# Altium PCB PCB1.PcbDoc
Units mm, origin at the board's own origin, x right, y up, seen from the top; angles counter-clockwise.
Board outline 80 x 75 mm, 2 copper layers (Top Layer, Bottom Layer); 50 components, 62 nets, 269 pads, 71 vias.
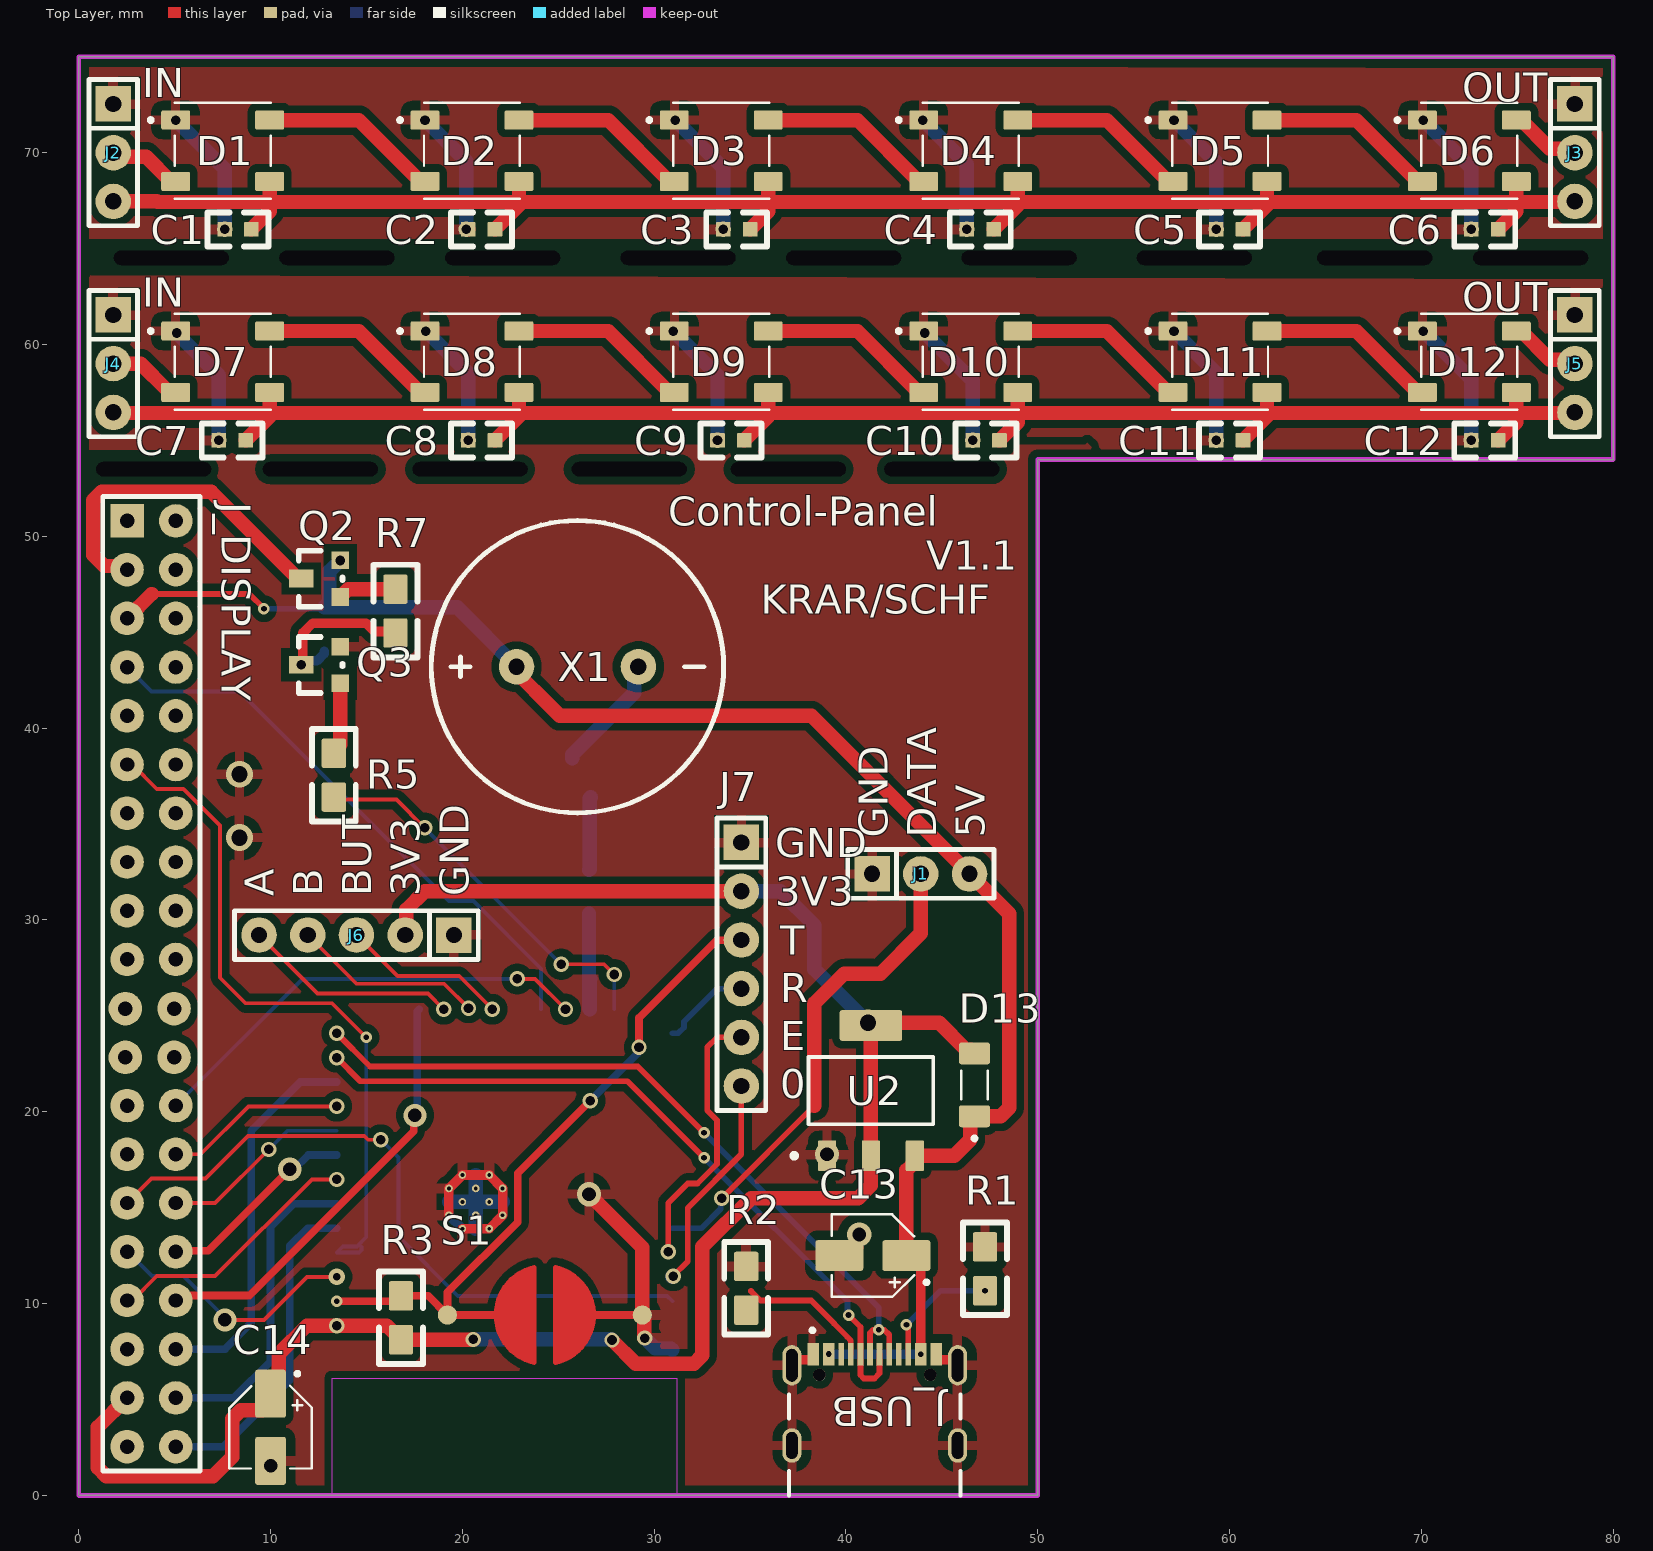
[diagram p0: Top Layer view]
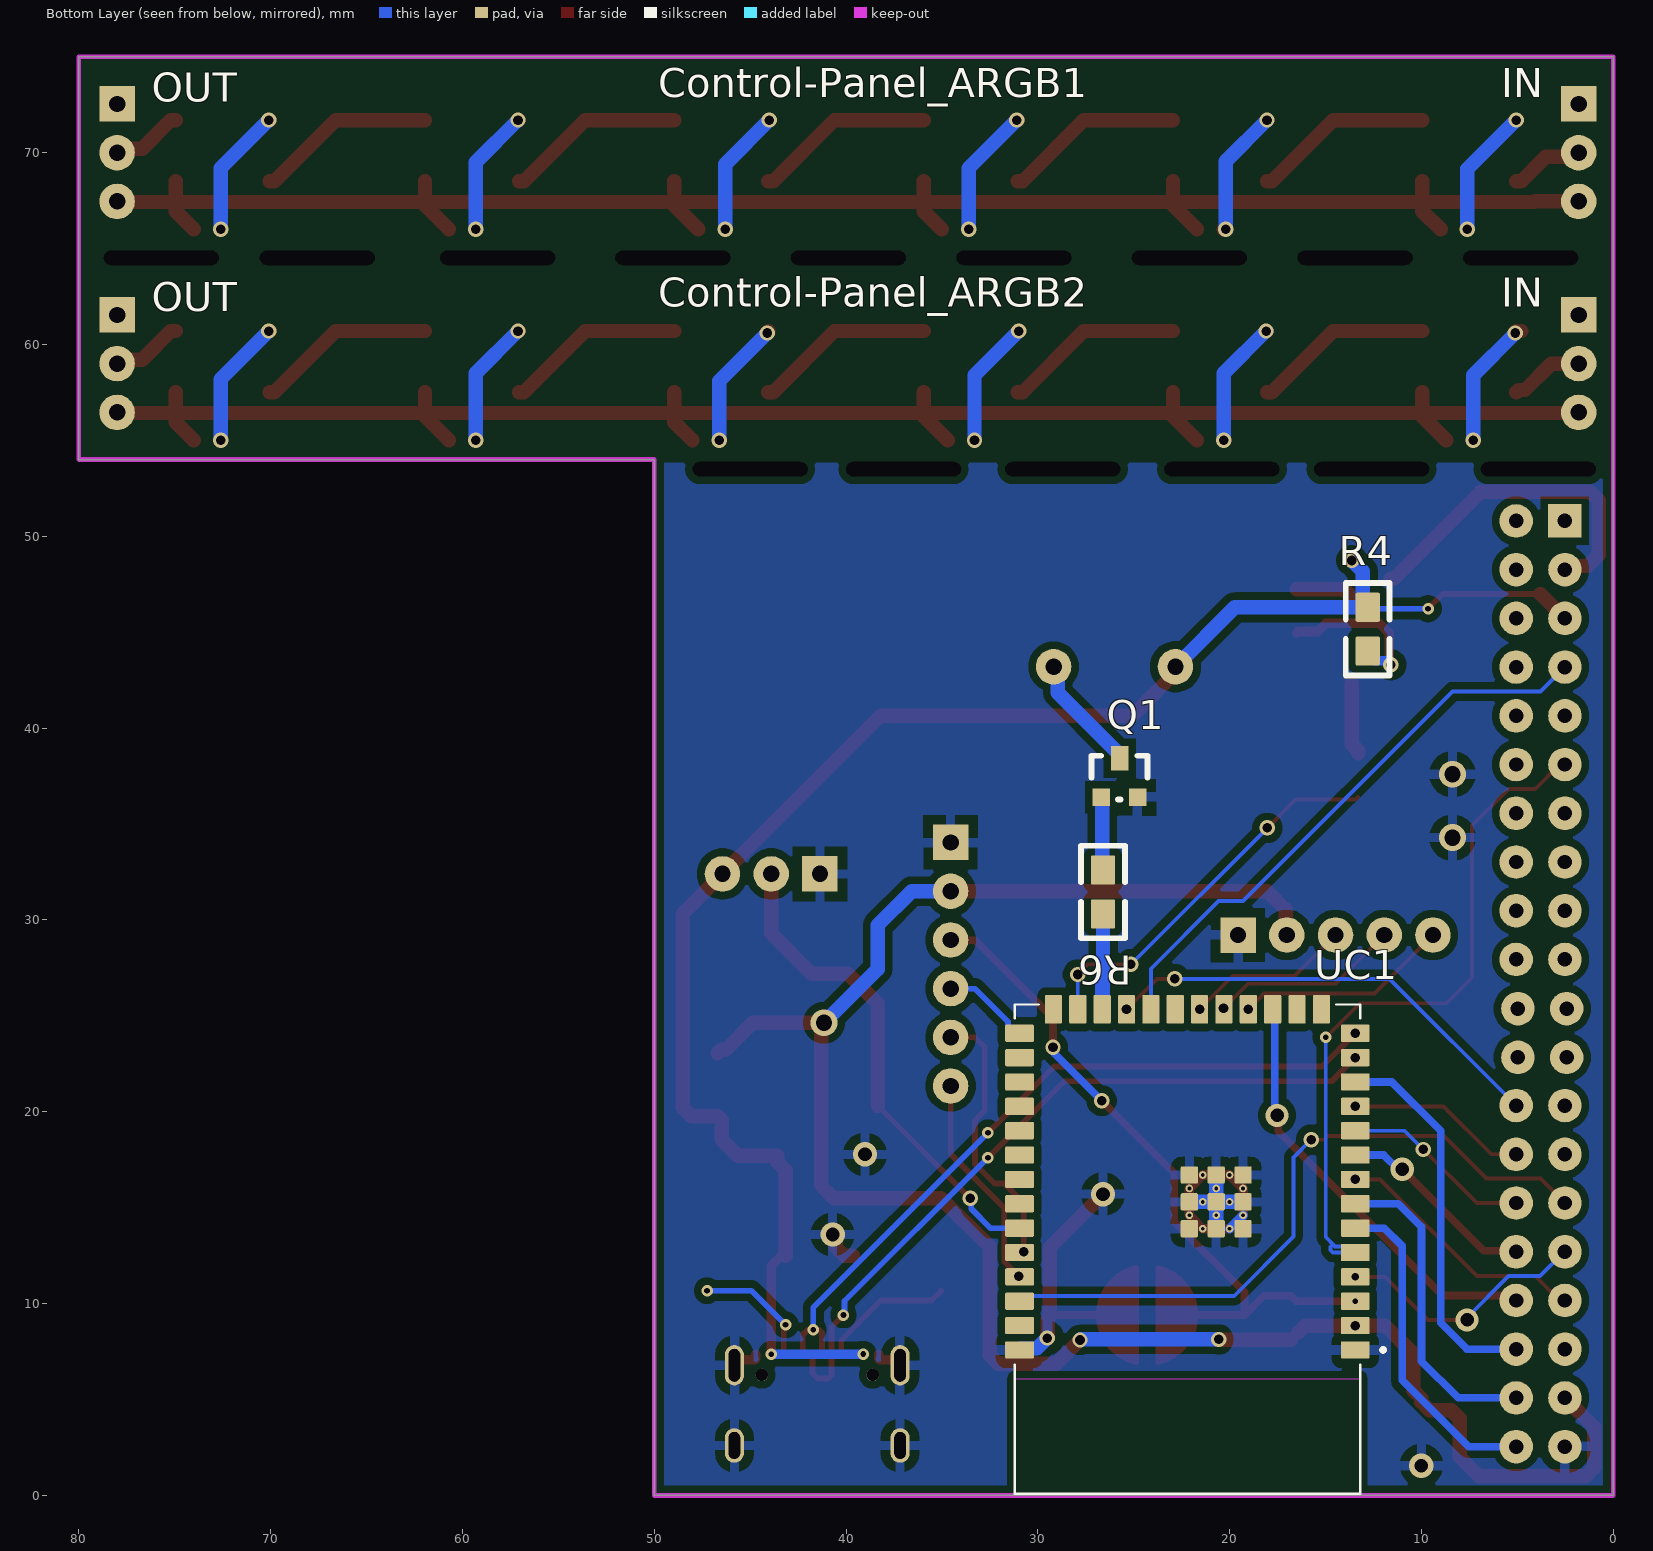
[diagram p1: Bottom Layer view, seen from below]

## Layer stack, top to bottom
Top Solder: solder mask 0.0102, Solder Resist, Dk 3.5
Top Layer: signal copper 0.0356
Dielectric 1: dielectric 0.32, FR-4, Dk 4.8
Bottom Layer: signal copper 0.0356
Bottom Solder: solder mask 0.0102, Solder Resist, Dk 3.5

## Board outline
0,0 50,0 50,54 80,54 80,75 0,75

## Design rules (kind name [scope] priority, off if disabled: settings)
Clearance [All] p1: gap=0.4 ignorepadtopadclearanceinfootprint=FALSE except(0.2: Arc-Arc Arc-Track Arc-SMDPad Arc-THPad Arc-Via Arc-Text Arc-Hole Track-Track Track-SMDPad Track-THPad Track-Via Track-Text Track-Hole SMDPad-SMDPad SMDPad-THPad SMDPad-Via SMDPad-Text SMDPad-Hole THPad-THPad THPad-Via THPad-Text THPad-Hole Via-Via Via-Text Via-Hole Text-Text Text-Hole)
HoleSize [All] p1: absolutevalues=TRUE maxlimit=6 minlimit=0.4 maxpercent=80.000 minpercent=20.000
MinimumAnnularRing [All] p1: minimumring=0.5
MinimumSolderMaskSliver [All] p1: minsoldermaskwidth=0
PolygonConnect [All] p1: connectstyle=Relief reliefconductorwidth=0.5 reliefentries=4 polygonreliefangle="90 Angle" airgapwidth=0.5
RoutingVias [All] p1: holewidth=0.75 width=1.5 viastyle="Through Hole" minholewidth=0.2 minwidth=0.6 maxholewidth=1.2 maxwidth=2
SilkToSilkClearance [All] p1: silktosilkclearance=0
SilkToSolderMaskClearance [IsPad] p1: minsilkscreentomaskgap=0 clearancetoexposedcopper=TRUE
SolderMaskExpansion [All] p1: expansion=0.102 istentingtop=FALSE
Width [All] p1: maxlimit=6 minlimit=0.2 preferedwidth=0.75
26 further rules are at their usual default settings.

## Components (designator, comment, footprint, x,y, rotation, side; value= is the part's Value field where it differs from the comment)
C1 "100nF" C_SMD_0603 8.302,66 r0 top
C2 "100nF" C_SMD_0603 21,66 r0 top
C3 "100nF" C_SMD_0603 34.302,66 r0 top
C4 "100nF" C_SMD_0603 47,66 r0 top
C5 "100nF" C_SMD_0603 60,66 r0 top
C6 "100nF" C_SMD_0603 73.302,66 r0 top
C7 "100nF" C_SMD_0603 8,55 r0 top
C8 "100nF" C_SMD_0603 21,55 r0 top
C9 "100nF" C_SMD_0603 34,55 r0 top
C10 "100nF" C_SMD_0603 47.302,55 r0 top
C11 "100nF" C_SMD_0603 60,55 r0 top
C12 "100nF" C_SMD_0603 73.302,55 r0 top
C13 "10µF" C_SMD_B-Typ 41.4,12.5 r180 top
C14 "10µF" C_SMD_B-Typ 10,3.55 r270 top
D1 "WS2812b" D_SMD_LED-ARGB 8,70 r180 top
D2 "WS2812b" D_SMD_LED-ARGB 21,70 r180 top
D3 "WS2812b" D_SMD_LED-ARGB 34,70 r180 top
D4 "WS2812b" D_SMD_LED-ARGB 47,70 r180 top
D5 "WS2812b" D_SMD_LED-ARGB 60,70 r180 top
D6 "WS2812b" D_SMD_LED-ARGB 73,70 r180 top
D7 "WS2812b" D_SMD_LED-ARGB 8,59 r180 top
D8 "WS2812b" D_SMD_LED-ARGB 21,59 r180 top
D9 "WS2812b" D_SMD_LED-ARGB 34,59 r180 top
D10 "WS2812b" D_SMD_LED-ARGB 47,59 r180 top
D11 "WS2812b" D_SMD_LED-ARGB 60,59 r180 top
D12 "WS2812b" D_SMD_LED-ARGB 73,59 r180 top
D13 "FDLL4148" SOD-80-2 46.7,21.4 r90 top
J1 "OUTPUT_PCB" Sip-3 43.9,32.4 r0 top
J2 "INPUT_L1" Sip-3 1.8,70 r270 top
J3 "OUTPUT_L1" Sip-3 78,70 r270 top
J4 "INPUT_L2" Sip-3 1.8,59 r270 top
J5 "OUTPUT_L2" Sip-3 78,59 r270 top
J6 "ENCODER_KY-040" SIP-5 14.478,29.21 r180 top
J7 "SERIAL" SIP-6 34.544,26.416 r270 top
J_DISPLAY "DISPLAY" J_2x20 3.744,26.67 r270 top
J_USB "J_USB-C" GCT_USB4105-GF-A 41.5,2.6 r0 top
Q1 "BC846" SOT-23-3_BC846 26.7,36.4 r180 bottom
Q2 "BC856" SOT-23-3_BC856 13.632,46.835 r90 top
Q3 "BC846" SOT-23-3_BC846 13.632,42.335 r90 top
R1 "5k1" R_SMD_0805 47.244,11.811 r270 top
R2 "5k1" R_SMD_0805 34.798,10.795 r270 top
R3 "10k" R_SMD_0805 16.8,9.257 r270 top
R4 "10k" R_SMD_0805 12.8,45.157 r90 bottom
R5 "1k" R_SMD_0805 13.3,37.543 r270 top
R6 "1k" R_SMD_0805 26.6,31.457 r270 bottom
R7 "1k" R_SMD_0805 16.51,46.101 r270 top
S1 "Lötpad" S_SMD_Pad-NO 24.3,9.4 r180 top
U2 "AMS1117" U_SMD_AMS1117 41.3,21.1 r90 top
UC1 "UC_ESP32-S3-WROOM" XCVR_ESP32S3WROOM1N8R8 22.2,12.84 r0 bottom
X1 "Piezo" X_THT_PIEZZO 26,43.2 r0 top

## Footprints (in the part's own frame and the unit in brackets; to place one, negate y for a bottom-side part, rotate by r counter-clockwise, add the part's x,y. Pads: shape width x height; smd on the part's side, far side on the other; paste and mask are expansions set on the pad)
C_SMD_0603 [mil] "LB-2024-04-17"
  rrect10% 30x30 smd paste-0.79 mask+1.97: 1(-27.5,0) 2(27.5,0)
  silkscreen extent -62,-35 62,35
C_SMD_B-Typ [mm] "LB-2024-04-16"
  rrect15% 2.5x1.6 smd paste-0.02 mask+0.05: 1(-1.75,0) 2(1.75,0)
  silkscreen extent -2.89,-2.15 2.15,2.15
D_SMD_LED-ARGB [mm] "LB-2024-04-17"
  rrect15% 1.5x1 smd paste-0.02 mask+0.05: 1(-1.95,1.5) 2(-1.95,-1.7) 3(2.95,-1.7) 4(2.95,1.5)
  silkscreen extent -2,-2.6 4.35,2.4
GCT_USB4105-GF-A [mm] "USB-C: Power + USB 2.0"
  rect 0.6x1.15 smd mask+0.05: A1_B12(-3.2,4.755) A4_B9(-2.4,4.755) B1_A12(3.2,4.755) B4_A9(2.4,4.755)
  rect 0.3x1.15 smd mask+0.05: A5(-1.25,4.755) A6(-0.25,4.755) A7(0.25,4.755) A8(1.25,4.755) B5(1.75,4.755) B6(0.75,4.755) B7(-0.75,4.755) B8(-1.75,4.755)
  oval 1x2.1 hole 0.6 slot 1.7 at 90 deg: SH1(-4.32,4.18) SH2(4.32,4.18)
  oval 1x1.8 hole 0.6 slot 1.4 at 90 deg: SH3(-4.32,0) SH4(4.32,0)
  round 0.65 hole 0.65 unplated: ""(-2.89,3.68) ""(2.89,3.68)
  silkscreen extent -4.47,-2.6 4.47,6.1
J_2x20 [mm] "LB-2024-4-19"
  rect 1.75x1.75 hole 0.75: 1(-24.13,-1.224)
  round 1.75 hole 0.75: 2(-24.13,1.316) 3(-21.59,-1.224) 4(-21.59,1.316) 5(-19.05,-1.224) 6(-19.05,1.316) 7(-16.51,-1.224) 8(-16.51,1.316) 9(-13.97,-1.224) 10(-13.97,1.316) 11(-11.43,-1.224) 12(-11.43,1.316) 13(-8.89,-1.224) 14(-8.89,1.316) 15(-6.35,-1.224) 16(-6.35,1.316) 17(-3.81,-1.224) 18(-3.81,1.316) 19(-1.27,-1.224) 20(-1.27,1.316) 21(1.296,-1.316) 22(1.296,1.224) 23(3.836,-1.316) 24(3.836,1.224) 25(6.35,-1.224) 26(6.35,1.316) 27(8.89,-1.224) 28(8.89,1.316) 29(11.43,-1.224) 30(11.43,1.316) 31(13.97,-1.224) 32(13.97,1.316) 33(16.51,-1.224) 34(16.51,1.316) 35(19.05,-1.224) 36(19.05,1.316) 37(21.59,-1.224) 38(21.59,1.316) 39(24.13,-1.224) 40(24.13,1.316)
  silkscreen extent -25.4,-2.49 25.4,2.59
R_SMD_0805 [mil] "LB-2024-04-17"
  rrect15% 60x50 smd paste-0.79 mask+1.97: 1(-45,0) 2(45,0)
  silkscreen extent -95,-45 95,45
S_SMD_Pad-NO [mm] "LB-2024-04-18"
  round 1 smd: 1(-5.08,0) 2(5.08,0)
  Top Layer region: -0.551,-2.48 -0.551,2.48 -0.618,2.413 -1.016,2.413 -1.524,1.905 -1.651,1.905 -2.159,1.397 -2.159,1.143 -2.54,0.762 -2.54,-0.762 -2.159,-1.143 -2.159,-1.397 -1.27,-2.286 -1.016,-2.286 -0.762,-2.54 -0.702,-2.48
  Top Layer region: 0.551,2.48 0.551,-2.48 0.618,-2.413 1.016,-2.413 1.524,-1.905 1.651,-1.905 2.159,-1.397 2.159,-1.143 2.54,-0.762 2.54,0.762 2.159,1.143 2.159,1.397 1.27,2.286 1.016,2.286 0.762,2.54 0.702,2.48
  Top Layer lines w0.254: 2.54,0 ccw(c0,0) 0.551,2.48 0.551,-2.48 ccw(c0,0) 2.54,0 ; -0.551,2.48 ccw(c0,0) -0.551,-2.48 -0.551,2.48
  Top Layer lines w0.4: 5.08,0 2.54,0 2.032,0 ; -2.032,0 -5.08,0
Sip-3 [mm] "LB-2024-04-17"
  rect 1.85x1.85 hole 0.85: 1(-2.54,0)
  round 1.85 hole 0.85: 2(0,0) 3(2.54,0)
  silkscreen extent -3.81,-1.27 3.81,1.27
SIP-5 [mm] "LB-2024-04-17"
  rect 1.85x1.85 hole 0.85: 1(-5.08,0)
  round 1.85 hole 0.85: 2(-2.54,0) 3(0,0) 4(2.54,0) 5(5.08,0)
  silkscreen extent -6.35,-1.27 6.35,1.27
SIP-6 [mm] "LB-2024-04-17"
  rect 1.85x1.85 hole 0.85: 1(-7.62,0)
  round 1.85 hole 0.85: 2(-5.08,0) 3(-2.54,0) 4(0,0) 5(2.54,0) 6(5.08,0)
  silkscreen extent -8.89,-1.27 6.35,1.27
SOD-80-2 [mm] "SMD-Dioden Footprint z.b.: FDLL4148"
  rrect25% 1.14x1.63 smd: 1(1.64,0) 2(-1.64,0)
  silkscreen extent -2.89,-0.7 0.75,0.7
SOT-23-3_BC846 [mil] "SMD Footprint für BC846"
  rect 36x36 smd: B(0,0) E(75,0)
  rect 36x50 smd: C(38,80)
  silkscreen extent -20,-5 95,85
SOT-23-3_BC856 [mil] "SMD Footprint für BC856 (PNP)"
  rect 36x36 smd: B(0,0) E(75,0)
  rect 36x50 smd: C(38,80)
  silkscreen extent -20,-5 95,85
U_SMD_AMS1117 [mm] "LB-2024-04-17"
  rrect15% 1.604x0.952 smd paste-0.02 mask+0.05: 1(-3.395,2.29) 2(-3.395,0) 3(-3.395,-2.29)
  rrect15% 1.604x3.262 smd paste-0.02 mask+0.05: 2(3.395,0)
  silkscreen extent -3.52,-3.25 1.75,4.12
X_THT_PIEZZO [mm] "LB-2024-04-18"
  round 1.85 hole 0.85: 1(-3.175,0) 2(3.175,0)
  silkscreen extent -7.62,-7.62 7.62,7.62
XCVR_ESP32S3WROOM1N8R8 [mm]
  rrect15% 1.5x0.9 smd paste-0.02 mask+0.05: 1(-8.75,5.26) 1(8.75,5.26) 2(-8.75,3.99) 3(-8.75,2.72) 4(-8.75,1.45) 5(-8.75,0.18) 6(-8.75,-1.09) 7(-8.75,-2.36) 8(-8.75,-3.63) 9(-8.75,-4.9) 10(-8.75,-6.17) 11(-8.75,-7.44) 12(-8.75,-8.71) 13(-8.75,-9.98) 14(-8.75,-11.25) 27(8.75,-11.25) 28(8.75,-9.98) 29(8.75,-8.71) 30(8.75,-7.44) 31(8.75,-6.17) 32(8.75,-4.9) 33(8.75,-3.63) 34(8.75,-2.36) 35(8.75,-1.09) 36(8.75,0.18) 37(8.75,1.45) 38(8.75,2.72) 39(8.75,3.99)
  rrect15% 0.9x0.9 smd paste-0.02 mask+0.05: 1(-2.9,-3.86) 1(-2.9,-2.46) 1(-2.9,-1.06) 1(-1.5,-3.86) 1(-1.5,-2.46) 1(-1.5,-1.06) 1(-0.1,-3.86) 1(-0.1,-2.46) 1(-0.1,-1.06)
  round 0.4 hole 0.2 mask+0: 1(-2.9,-3.16) 1(-2.9,-1.76) 1(-2.2,-3.86) 1(-2.2,-2.46) 1(-2.2,-1.06) 1(-1.5,-3.16) 1(-1.5,-1.76) 1(-0.8,-3.86) 1(-0.8,-2.46) 1(-0.8,-1.06) 1(-0.1,-3.16) 1(-0.1,-1.76)
  rrect15% 0.9x1.5 smd paste-0.02 mask+0.05: 15(-6.985,-12.5) 16(-5.715,-12.5) 17(-4.445,-12.5) 18(-3.175,-12.5) 19(-1.905,-12.5) 20(-0.635,-12.5) 21(0.635,-12.5) 22(1.905,-12.5) 23(3.175,-12.5) 24(4.445,-12.5) 25(5.715,-12.5) 26(6.985,-12.5)
  Keep-Out Layer region: 9,6.75 -9,6.75 -9,12.75 9,12.75
  Keep-Out Layer region: 9,6.75 -9,6.75 -9,12.75 9,12.75
  silkscreen extent -10.3,-12.75 9,12.75

## Part data
C1 C2 C3 C4 C5 C6 C7 C8 C9 C10 C11 C12: library part C_SMD_KO, "Kondensator SMD Universal, Keramik, Folie, usw."
C13 C14: library part C_SMD_ELK, "SMD Elektrolytkondensator"
D1 D2 D3 D4 D5 D6 D7 D8 D9 D10 D11 D12: library part D_SMD_LED-ARGB, "Diode SMD ARGB"
D13: library part D_SMD_Silizium, "Diode SMD Silizium", Spannung For.=0,7V
J1 J2 J3 J4 J5: library part J_THT_CON3, "Stecker"
J6: library part J_THT_CON5, "Stecker"
J7: library part J_THT_CON6, "Stecker"
J_DISPLAY: library part "J_THT_IDC 2x20", "IDC-Con 2x20"
J_USB: "USB4105-GF-", Package=None, Availability=Unavailable, MF="{'manufacturer': u'GCT'}", MP=USB4105-GF-A, Price=None
Q1 Q3: library part Q_SMD_NPN, "NPN Transistor"
Q2: library part Q_SMD_PNP, "PNP Transistor"
R1 R2 R3 R4 R5 R6 R7: library part R_SMD_Widerstand, "Widerstand SMD"
S1: library part S_SMD_Jumper, "Lötverbinder"
U2: library part U_SMD_AMS1117, "Linearwandler", Dropout Voltage=1.1V, Manufacturer="Advanced Monolithic Systems", Manufacturer Part Number=AMS1117-3.3, Max Junction Temp=+125°C, Max Power Dissipation=1.2W, Max Supply Voltage=15V, Nominal Supply Current=5mA, Output Current=1A, Output Voltage=3.3V, Temperature="-40°C to +125°C", Temperature Range Low=-40°C, Automotive=No, Category=IC, ComponentLink2Description=Datasheet, ComponentLink2URL=http://www.advanced-monolithic.com/pdf/ds1117.pdf, Device Class L1="Integrated Circuits (ICs)", Device Class L2="Power Management ICs", Device Class L3="Voltage Regulators - Linear", Height=1.8mm, Ipc Land Pattern Name=SOT229P700X180-4, Lead Free=Yes, Number Of Outputs=1, Octopart=https://octopart.com/ams1117-3.3-advanced+monolithic+systems-25899300, Output Type=Fixed, Package=AMS1117, RoHS=TRUE, Standoff Height=0.64mm, Temperature Range High=+125°C
UC1: "Bluetooth, WiFi 802.11b/g/n, Bluetooth v5.0 Transceiver Module 2.4GHz PCB Trace Surface Mount", Package=None, Availability="In Stock", Check_prices=https://www.snapeda.com/parts/ESP32-S3-WROOM-1-N8R8/Espressif+Systems/view-part/?ref=eda, MF="Espressif Systems", MP=ESP32-S3-WROOM-1-N8R8, Price=None, Purchase-URL=https://pricing.snapeda.com/search?q=ESP32-S3-WROOM-1-N8R8&ref=eda, SnapEDA_Link=https://www.snapeda.com/parts/ESP32-S3-WROOM-1-N8R8/Espressif+Systems/view-part/?ref=snap
X1: library part X_THT_Piezo, "Piezobuzzer"

## Free pads (board coordinates)
  round 0 hole 0.75 slot 6 at 0 deg unplated: (3.9,53.5) (4.826,64.516) (12.6,53.5) (13.462,64.516) (20.4,53.5) (22.098,64.516) (28.7,53.5) (31.242,64.516) (37,53.5) (39.878,64.516) (45,53.5) (49.022,64.516) (58.166,64.516) (67.564,64.516) (75.692,64.516)

## Via types
v1: diameter 0.8, hole 0.5, Top Layer to Bottom Layer, 49 vias
v2: diameter 0.6, hole 0.3, Top Layer to Bottom Layer, 11 vias
v3: diameter 1.27, hole 0.711, Top Layer to Bottom Layer, 4 vias
v4: diameter 1.4, hole 0.85, Top Layer to Bottom Layer, 3 vias
v5: diameter 1.2, hole 0.7, Top Layer to Bottom Layer, 3 vias
v6: diameter 0.85, hole 0.4, Top Layer to Bottom Layer, 1 vias

## Nets (pads, with @x,y where several pads share a name; then routed paths per layer and width w, separated by ;. In a path a pad name is that pad's centre, name@x,y a point inside that pad or via, vN(x,y) a via of type N, cw(c..) or ccw(c..) an arc to the next point about the centre after c; other vN are vias at no path point)
3V3: C14.1 D13.1 J6.2 J7.2 J_DISPLAY.37 R3.2 U2.2 UC1.2 | length 102.5
  Top Layer w0.75: J_DISPLAY.37 1,3.56 1,1.439 1.439,1 7,1 8,2 8,4 8.439,4.439 9.575,4.439 10,4.864 10,5.05 10.425,5.475 10.425,7.377 11.898,8.85 v1(13.45,8.85) 16.064,8.85 R3.2@16.413,8.501 ; R3.2 16.807,8.121 20.567,8.121 v1(20.574,8.128) ; J6.2 17.083,29.275 17.083,30.545 18.034,31.496 J7.2 ; v1(27.8,8.1) 29.035,6.865 32.073,6.865 32.512,7.304 32.512,12.954 35.052,15.494 40.64,15.494 41.3,16.154 41.3,17.705 U2.2@41.3,24.495 ; v4(41.148,24.638) 41.291,24.495 U2.2@41.3,24.495 ; D13.1 46.505,23.235 46.26,23.235 44.857,24.638 41.443,24.638 U2.2@41.3,24.495
  Bottom Layer w0.75: v1(20.574,8.128) 27.758,8.128 27.786,8.1 v1(27.8,8.1) ; J7.2 36.576,31.496 38.354,29.718 38.354,27.432 v4(41.148,24.638)
5V-BUS: C13.1 D13.2 J1.3 J_DISPLAY.5 J_USB.A4_B9 J_USB.B4_A9 Q2.E R4.2 U2.3 X1.1 | length 88.9
  Top Layer w0.3: 3.81,46.99 8.89,46.99 v2(9.652,46.228)
  Top Layer w0.5: J_USB.A4_B9 v2(39.1,7.366) ; C13.1 43.35,12.5 43.9,11.95 v2(43.9,7.355)
  Top Layer w0.75: J_DISPLAY.5 3.79,46.99 3.81,46.99 ; X1.1 22.825,42.902 24.638,41.089 24.638,41.079 25.077,40.64 38.2,40.64 J1.3 48.514,30.326 48.514,20.199 48.075,19.76 D13.2 46.677,19.76 46.482,19.565 46.482,18.542 45.645,17.705 U2.3 43.59,17.379 43.15,16.939 C13.1
  Bottom Layer w0.3: v2(9.652,46.228) 12.728,46.228 R4.2
  Bottom Layer w0.5: v2(39.1,7.366) 43.889,7.366 v2(43.9,7.355)
  Bottom Layer w0.75: v1(13.632,48.74) 13.06,48.168 13.06,46.56 R4.2 19.725,46.3 X1.1
ARGB: J1.2 UC1.35 | length 25.8
  Top Layer w0.3: v1(33.528,15.494) 38.354,20.32
  Top Layer w0.75: 38.354,20.32 38.354,25.654 39.9,27.2 41.8,27.2 43.9,29.3 J1.2
  Bottom Layer w0.3: UC1.35 32.461,13.93 33.475,14.945 33.475,15.441 v1(33.528,15.494)
CS: J_DISPLAY.11 UC1.5 | length 36.8
  Top Layer w0.2: J_DISPLAY.11 2.794,38.1 4.064,36.83 5.452,36.83 7.366,34.916 7.366,26.987 8.699,25.654 13.208,25.654 v2(14.986,23.876)
  Bottom Layer w0.2: 14.732,12.954 14.743,12.943 14.743,12.777 14.626,12.66 UC1.5 13.766,12.976 14.5,12.976 14.986,13.462 v2(14.986,23.876)
D0: J_DISPLAY.40 UC1.6 | length 17.2
  Bottom Layer w0.4: J_DISPLAY.40 7.54,2.54 11,6 11,13 11.93,13.93 UC1.6
D1: J_DISPLAY.38 UC1.7 | length 16.7
  Bottom Layer w0.4: J_DISPLAY.38 8.08,5.08 10,7 10,14 11.2,15.2 UC1.7
D2: J_DISPLAY.36 UC1.12 | length 20
  Bottom Layer w0.4: J_DISPLAY.36 7.62,7.62 9,9 9,19 11.55,21.55 UC1.12
D3: J_DISPLAY.34 UC1.17 | length 22.5
  Top Layer w0.4: J_DISPLAY.34 5.314,10.414 8.89,10.414 17.458,18.982 17.458,19.744 v5(17.526,19.812)
  Bottom Layer w0.4: v5(17.526,19.812) 17.641,19.927 17.641,25.226 UC1.17
D4: J_DISPLAY.32 UC1.9 | length 10.5
  Top Layer w0.4: J_DISPLAY.32 5.111,12.751 6.751,12.751 v5(11,17)
  Bottom Layer w0.4: v5(11,17) 11.216,17 11.956,17.74 UC1.9
D5: J_DISPLAY.30 UC1.10 | length 10
  Top Layer w0.2: J_DISPLAY.30 7.112,15.24 v1(9.906,18.034)
  Bottom Layer w0.2: v1(9.906,18.034) 10.882,19.01 UC1.10
D6: J_DISPLAY.28 UC1.11 | length 9.4
  Top Layer w0.2: J_DISPLAY.28 6.35,17.78 8.85,20.28 v1(13.45,20.28)
D7: J_DISPLAY.26 UC1.23 | length 23.7
  Top Layer w0.2: v1(22.86,26.924) 23.791,26.924 v1(25.375,25.34)
  Bottom Layer w0.2: J_DISPLAY.26 11.664,26.924 v1(22.86,26.924)
D+: J_USB.A6 J_USB.B6 UC1.14 | length 38.6
  Top Layer w0.3: v1(13.45,24.09) 15.188,22.352 29.148,22.352 v2(32.6,18.9) ; J_USB.A6 41.25,8.46 41.426,8.636 v2(41.707,8.636) 41.988,8.636 42.25,8.374 J_USB.B6
  Bottom Layer w0.3: v2(32.6,18.9) 41.707,9.793 v2(41.707,8.636)
D-: J_USB.A7 J_USB.B7 UC1.13 | length 38.2
  Top Layer w0.3: v1(13.45,22.82) 14.68,21.59 28.61,21.59 v2(32.6,17.6) ; v2(40.132,9.398) 40.75,8.78 J_USB.B7 40.75,6.272 40.926,6.096 41.48,6.096 41.75,6.366 J_USB.A7
  Bottom Layer w0.3: v2(32.6,17.6) 40.075,10.125 40.075,9.455 v2(40.132,9.398)
E_A: J6.5 UC1.18 | length 11.2
  Top Layer w0.2: J6.5 12.446,26.162 18.203,26.162 v1(19.025,25.34)
E_B: J6.4 UC1.19 | length 10
  Top Layer w0.2: J6.4 14.478,26.67 19.05,26.67 v1(20.32,25.4)
E_BUT: J6.3 UC1.20 | length 8.7
  Top Layer w0.2: J6.3 16.618,27.07 19.835,27.07 v1(21.565,25.34)
EN: J7.3 R3.1 S1.2 UC1.3 | length 32.9
  Top Layer w0.4: v2(13.45,10.12) 16.52,10.12 R3.1 18.22,10.4 S1.2 19.22,10.584 22.88,14.244 22.88,16.784 v1(26.67,20.574) ; v1(29.21,23.368) 29.21,24.892 33.253,28.935 34.523,28.935 J7.3
  Bottom Layer w0.4: v1(26.67,20.574) 29.133,23.037 29.133,23.291 v1(29.21,23.368)
GND: C13.2 C14.2 J1.1 J6.1 J7.1 J_DISPLAY.39 J_USB.A1_B12 J_USB.B1_A12 J_USB.SH1 J_USB.SH2 J_USB.SH3 J_USB.SH4 Q1.E Q3.E R1.1 R2.1 S1.1 U2.1 UC1.1 | length 30.4
  Top Layer w0.5: UC1.1@19.3,14.6 19.3,16 20,16.7 21.4,16.7 22.1,16 22.1,14.6 21.4,13.9 UC1.1@20,13.9 ; J_USB.SH1 37.18,6.837 37.411,7.067 38.25,7.067 38.3,7.117 J_USB.A1_B12 ; J_USB.B1_A12 44.7,7.117 44.75,7.067 45.589,7.067 45.82,6.837 J_USB.SH2
  Top Layer w0.75: v3(26.6,15.7) 29.38,12.92 S1.1 29.38,9.332 29.49,9.222 29.49,8.21 v1(29.5,8.2) ; C13.2 40.1,12.5 40.525,12.925 40.525,13.284 40.7,13.459 v3(40.7,13.6)
  Bottom Layer w0.5: UC1.1@19.3,14.6 UC1.1@20,13.9
  Bottom Layer w0.75: UC1.1@19.3,15.3 20,15.3 UC1.1@20.7,15.3 ; UC1.1@20.7,13.9 20.7,14.6 UC1.1@20.7,15.3 ; UC1.1@20.7,16.7 20.7,16 UC1.1@20.7,15.3 ; UC1.1@22.1,15.3 21.4,15.3 UC1.1@20.7,15.3 ; v1(29.5,8.2) 29.514,8.2 30.059,7.655 30.875,7.655 UC1.1@30.95,7.58
  other v3: 10,1.55 39.01,17.775
  other v4: 8.382,34.29 8.382,37.592
GPI0: J7.4 UC1.27 | length 4.7
  Bottom Layer w0.3: UC1.27 31.248,24.09 31.548,24.39 31.548,24.688 33.276,26.416 J7.4
LED_A: J_DISPLAY.3 Q2.C | length 17.8
  Top Layer w0.75: J_DISPLAY.3 2.329,48.451 1.333,48.451 0.762,49.022 0.762,51.885 1.201,52.324 6.898,52.324 11.422,47.8 Q2.C
NetC1_1: C1.1 C2.1 C3.1 C4.1 C5.1 C6.1 D1.3 D2.3 D3.3 D4.3 D5.3 D6.3 J2.1 J3.1 | length 40.4
  Top Layer w0.75: v1(20.2,66) C2.1 ; D3.3 v1(31.1,71.7) ; v1(44,71.7) D4.3 ; D5.3 v1(57.1,71.7) ; D6.3 v1(70.1,71.7)
  Bottom Layer w0.75: v1(5.05,71.7) 7.603,69.147 v1(7.603,66) ; v1(18.05,71.7) 20.2,69.55 v1(20.2,66) ; v1(31.1,71.7) 33.603,69.197 v1(33.603,66) ; v1(44,71.7) 46.301,69.398 v1(46.301,66) ; v1(57.1,71.7) 59.3,69.5 v1(59.3,66) ; v1(70.1,71.7) 72.603,69.197 v1(72.603,66)
NetC1_2: C1.2 C2.2 C3.2 C4.2 C5.2 C6.2 D1.1 D2.1 D3.1 D4.1 D5.1 D6.1 J2.3 J3.3 | length 94
  Top Layer w0.75: J2.3 4.071,67.46 4.106,67.425 9.95,67.425 ; C1.2 9.95,66.95 9.95,67.425 ; D1.1 9.95,67.425 ; C2.2 22.95,67.252 22.95,67.425 ; D2.1 22.95,67.425 ; C3.2 35.95,66.95 35.95,67.425 ; D3.1 35.95,67.425 ; C4.2 48.95,67.252 48.95,67.425 ; D4.1 48.95,67.425 ; C5.2 61.95,67.252 61.95,67.425 ; D5.1 61.95,67.425 ; C6.2 74.95,66.95 74.95,67.425 ; D6.1 74.95,67.425 ; J3.3 77.965,67.425 74.95,67.425 ; 9.95,67.425 22.95,67.425 ; 22.95,67.425 35.95,67.425 ; 35.95,67.425 48.95,67.425 ; 48.95,67.425 61.95,67.425 ; 61.95,67.425 74.95,67.425
NetC7_1: C7.1 C8.1 C9.1 C10.1 C11.1 C12.1 D7.3 D8.3 D9.3 D10.3 D11.3 D12.3 J4.1 J5.1 | length 40.5
  Top Layer w0.75: D7.3@4.8,60.7 D7.3 5.05,60.65 v1(5.1,60.6) ; D8.3 v1(18.1,60.7) ; v1(31,60.7) D9.3 ; D10.3 44.05,60.65 v1(44.1,60.6) ; D11.3 v1(57.1,60.7) ; D12.3 v1(70.1,60.7)
  Bottom Layer w0.75: v1(5.1,60.6) 7.301,58.399 v1(7.301,55) ; v1(18.1,60.7) 20.302,58.498 v1(20.302,55) ; v1(31,60.7) 33.3,58.4 v1(33.3,55) ; v1(44.1,60.6) 46.603,58.097 v1(46.603,55) ; v1(57.1,60.7) 59.302,58.498 v1(59.302,55) ; v1(70.1,60.7) 72.603,58.197 v1(72.603,55)
NetC7_2: C7.2 C8.2 C9.2 C10.2 C11.2 C12.2 D7.1 D8.1 D9.1 D10.1 D11.1 D12.1 J4.3 J5.3 | length 94.1
  Top Layer w0.75: J4.3 1.835,56.425 9.95,56.425 ; C7.2 9.95,56.252 9.95,56.425 ; D7.1 9.95,56.425 ; C8.2 22.95,56.252 22.95,56.425 ; D8.1 22.95,56.425 ; C9.2 35.95,56.252 35.95,56.425 ; D9.1 35.95,56.425 ; C10.2 48.95,55.95 48.95,56.425 ; D10.1 48.95,56.425 ; C11.2 61.95,56.252 61.95,56.425 ; D11.1 61.95,56.425 ; C12.2 74.95,55.95 74.95,56.425 ; D12.1 74.95,56.425 ; J5.3 77.965,56.425 74.95,56.425 ; 9.95,56.425 22.95,56.425 ; 22.95,56.425 35.95,56.425 ; 35.95,56.425 48.95,56.425 ; 48.95,56.425 61.95,56.425 ; 61.95,56.425 74.95,56.425
NetD1_2: D1.2 D2.4 | length 9.4
  Top Layer w0.75: D1.2 14.6,71.7 17.8,68.5 D2.4
NetD1_4: D1.4 J2.2 | length 3.9
  Top Layer w0.75: J2.2 2.01,69.79 3.51,69.79 4.8,68.5 D1.4
NetD2_2: D2.2 D3.4 | length 9.4
  Top Layer w0.75: D2.2 27.6,71.7 30.8,68.5 D3.4
NetD3_2: D3.2 D4.4 | length 9.4
  Top Layer w0.75: D3.2 40.6,71.7 43.8,68.5 D4.4
NetD4_2: D4.2 D5.4 | length 9.4
  Top Layer w0.75: D4.2 53.6,71.7 56.8,68.5 D5.4
NetD5_2: D5.2 D6.4 | length 9.4
  Top Layer w0.75: D5.2 66.6,71.7 69.8,68.5 D6.4
NetD6_2: D6.2 J3.2 | length 3.8
  Top Layer w0.75: D6.2 75.2,71.7 76.69,70.21 77.79,70.21 J3.2
NetD7_2: D7.2 D8.4 | length 9.4
  Top Layer w0.75: D7.2 14.6,60.7 17.8,57.5 D8.4
NetD7_4: D7.4 J4.2 | length 3.9
  Top Layer w0.75: J4.2 3.23,59 4.605,57.625 4.925,57.625 D7.4
NetD8_2: D8.2 D9.4 | length 9.4
  Top Layer w0.75: D8.2 27.6,60.7 30.8,57.5 D9.4
NetD9_2: D9.2 D10.4 | length 9.4
  Top Layer w0.75: D9.2 40.6,60.7 43.8,57.5 D10.4
NetD10_2: D10.2 D11.4 | length 9.4
  Top Layer w0.75: D10.2 53.6,60.7 56.8,57.5 D11.4
NetD11_2: D11.2 D12.4 | length 9.4
  Top Layer w0.75: D11.2 66.6,60.7 69.8,57.5 D12.4
NetD12_2: D12.2 J5.2 | length 3.8
  Top Layer w0.75: D12.2 75.2,60.7 76.69,59.21 77.79,59.21 J5.2
NetJ_DISPLAY_6: J_DISPLAY.6
NetJ_DISPLAY_8: J_DISPLAY.8
NetJ_DISPLAY_10: J_DISPLAY.10
NetJ_DISPLAY_12: J_DISPLAY.12
NetJ_USB_A5: J_USB.A5 R2.2 | length 7
  Top Layer w0.3: 35.052,10.668 35.052,10.636 35.537,10.151 38.187,10.151 39.37,8.968 39.37,8.955 40.045,8.28 40.25,8.075 J_USB.A5
NetJ_USB_B5: J_USB.B5 R1.2 | length 6.4
  Top Layer w0.3: v2(43.15,8.89) 43.15,8.809 43.25,8.709 J_USB.B5
  Bottom Layer w0.3: v2(43.15,8.89) 44.928,10.668 v2(47.244,10.668)
NetQ1_B: Q1.B R6.1 | length 3.8
  Bottom Layer w0.75: R6.1 26.65,32.65 26.65,36.35 Q1.B
NetQ1_C: Q1.C X1.2 | length 6.2
  Bottom Layer w0.75: Q1.C 25.735,38.61 28.965,41.84 28.965,42.99 X1.2
NetQ2_B: Q2.B R7.1 | length 3
  Top Layer w0.75: Q2.B 14.041,47.244 R7.1
NetQ3_B: Q3.B R5.1 | length 3.8
  Top Layer w0.75: R5.1 13.3,38.813 13.632,39.145 Q3.B
NetQ3_C: Q3.C R4.1 R7.2 | length 8.5
  Top Layer w0.5: v1(11.6,43.3) 11.684,43.384 11.684,44.958 12.192,45.466 14.986,45.466 15.418,45.034 16.434,45.034 R7.2
  Bottom Layer w0.5: v1(11.6,43.3) 11.681,43.3 11.883,43.502 12.415,43.502 12.8,43.887 R4.1
NetR5_2: R5.2 UC1.25 | length 20.3
  Top Layer w0.2: R5.2 13.427,36.273 16.559,36.273 v1(18.034,34.798) ; v1(25.146,27.686) 27.382,27.686 v1(27.915,27.153)
  Bottom Layer w0.2: v1(18.034,34.798) v1(25.146,27.686) ; UC1.25 v1(27.915,27.153)
NetR6_2: R6.2 UC1.24 | length 6.6
  Bottom Layer w0.75: R6.2 26.6,25.385 UC1.24 26.645,26.899 26.67,26.924
RD: J_DISPLAY.29 UC1.38 | length 35.9
  Top Layer w0.2: J_DISPLAY.29 3.79,16.51 6.604,16.51 8.828,18.734 14.886,18.734 15.078,18.542 v1(15.748,18.542)
  Bottom Layer w0.2: v1(15.748,18.542) 16.675,17.615 16.675,13.485 19.761,10.4 30.67,10.4 UC1.38
RS: J_DISPLAY.33 UC1.8 | length 13.5
  Top Layer w0.2: J_DISPLAY.33 2.794,10.16 4.064,11.43 7.112,11.43 12.152,16.47 v1(13.45,16.47)
RST: J_DISPLAY.7 UC1.22 | length 30.2
  Bottom Layer w0.2: J_DISPLAY.7 3.79,41.91 8.382,41.91 19.304,30.988 20.574,30.988 24.105,27.457 UC1.22
RX: J7.5 UC1.36 | length 14.4
  Top Layer w0.3: v1(30.734,12.7) 30.734,15.24 31.75,16.256 32.258,16.256 33.274,17.272 33.274,19.558 32.766,20.066 32.766,23.368 33.274,23.876 J7.5
  Bottom Layer w0.3: v1(30.734,12.7) 30.774,12.66 UC1.36
Touch_CLK: J_DISPLAY.24
Touch_CS: J_DISPLAY.22
Touch_DI: J_DISPLAY.20
Touch_DO: J_DISPLAY.16
TX: J7.6 UC1.37 | length 11.4
  Top Layer w0.3: v1(30.988,11.43) 31.75,12.192 31.75,14.986 34.544,17.78 J7.6
  Bottom Layer w0.75: UC1.37 UC1.37 v1(30.988,11.43)
WR: J_DISPLAY.31 UC1.4 | length 13.4
  Top Layer w0.2: v5(7.62,9.144) 9.652,9.144 11.898,11.39 v6(13.45,11.39)
  Bottom Layer w0.2: J_DISPLAY.31 2.54,12.7 3.81,11.43 5.452,11.43 7.62,9.262 v5(7.62,9.144)
pads on no net: J_DISPLAY.1 J_DISPLAY.2 J_DISPLAY.4 J_DISPLAY.9 J_DISPLAY.13 J_DISPLAY.14 J_DISPLAY.15 J_DISPLAY.17 J_DISPLAY.18 J_DISPLAY.19 J_DISPLAY.21 J_DISPLAY.23 J_DISPLAY.25 J_DISPLAY.27 J_DISPLAY.35 J_USB. J_USB.A8 J_USB.B8 UC1.15 UC1.16 UC1.21 UC1.26 UC1.28 UC1.29 UC1.30 UC1.31 UC1.32 UC1.33 UC1.34 UC1.39

## Polygon pours and split planes (outlines as drawn)
GND on Top Layer "GND_L01_P000" (solid, remove dead copper, pour order 0): -5.422,0.082 -4.922,-0.418 60.278,-0.418 60.278,47.182 52.578,54.882 52.478,54.782 -3.722,54.782
NetC1_1 on Top Layer "NETC1_1_L01_P003" (solid, pour order 3): 0.3,74.6 0.3,65.5 79.6,65.5 79.5,65.6 79.5,74.4
NetC7_1 on Top Layer "NETC7_1_L01_P004" (solid, remove dead copper, pour order 4): 0.3,63.6 0.3,54.5 79.6,54.5 79.5,54.6 79.5,63.4
GND on Bottom Layer "GND_L02_P002" (solid, remove dead copper, pour order 2): -4.486,-0.872 -3.986,-1.372 61.214,-1.372 61.214,46.228 53.514,53.928 53.414,53.828 -2.786,53.828

## Keep-outs
Keep-Out Layer:
  the board outline again, w0.254

## Silkscreen, mask and mechanical layers (free items; w line width, h text height)
Top Overlay:
  text "IN" at 3.302,72.898 h1.52
  text "OUT" at 72.136,72.644 h1.52
  text "IN" at 3.302,61.976 h1.52
  text "OUT" at 72.136,61.722 h1.52
  text "Control-Panel" at 30.734,50.546 h1.52
  text "V1.1" at 44.196,48.26 h1.52
  text "KRAR/SCHF" at 35.56,45.974 h1.52
  text "GND" at 42.164,34.29 h1.52 r90
  text "DATA" at 44.704,34.29 h1.52 r90
  text "5V" at 47.244,34.29 h1.52 r90
  text "GND" at 36.322,33.274 h1.52
  text "A" at 10.16,31.242 h1.52 r90
  text "B" at 12.7,31.242 h1.52 r90
  text "BUT" at 15.24,31.242 h1.52 r90
  text "3V3" at 17.78,31.242 h1.52 r90
  text "GND" at 20.32,31.242 h1.52 r90
  text "3V3" at 36.322,30.734 h1.52
  text "T" at 36.576,28.194 h1.52
  text "R" at 36.576,25.694 h1.52
  text "E" at 36.576,23.194 h1.52
  text "0" at 36.576,20.694 h1.52
Bottom Overlay:
  text "IN" at 5.842,72.898 h1.52
  text "Control-Panel_ARGB1" at 49.784,72.898 h1.52
  text "OUT" at 76.2,72.644 h1.52
  text "IN" at 5.842,61.976 h1.52
  text "Control-Panel_ARGB2" at 49.784,61.976 h1.52
  text "OUT" at 76.2,61.722 h1.52
Kontur:
  lines w0.254: 0,0 50,0 50,53 0,53 0,0 ; 0,54 0,64 80,64 80,54 0,54 ; 0,65 80,65 80,75 0,75 0,65

## Text inside footprints (layer, text, board x,y; h text height)
J_USB: Mechanical 13 "PCB EDGE" at 39.8,0.2 h0.41